# EAGLE board MSP-EXP430F5137RxT_HW-V2_rev-b (EAGLE 5.08)
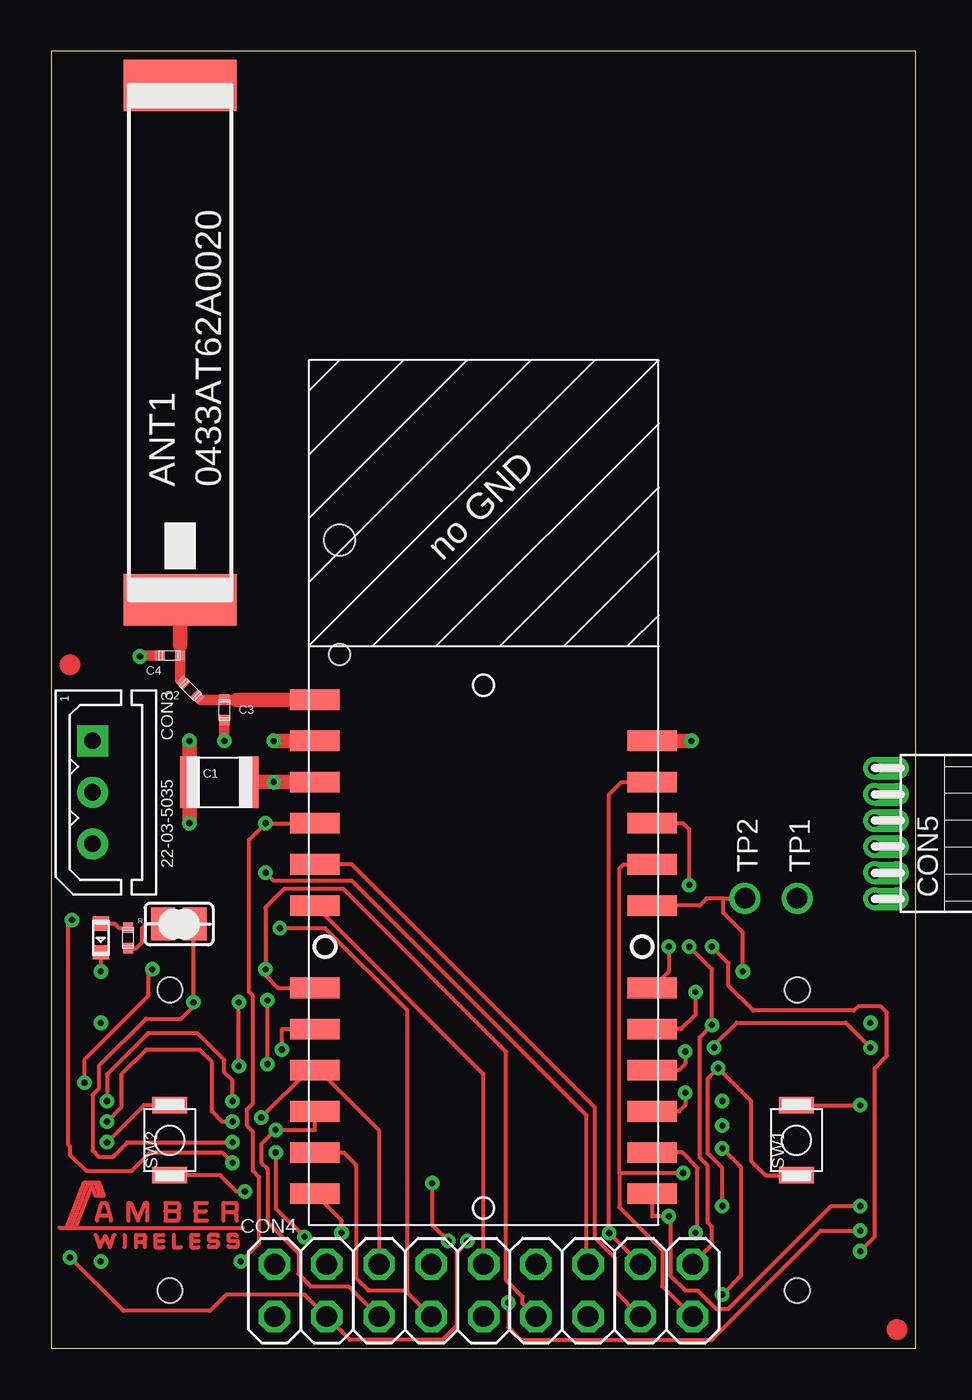
[diagram p0: board, top side]
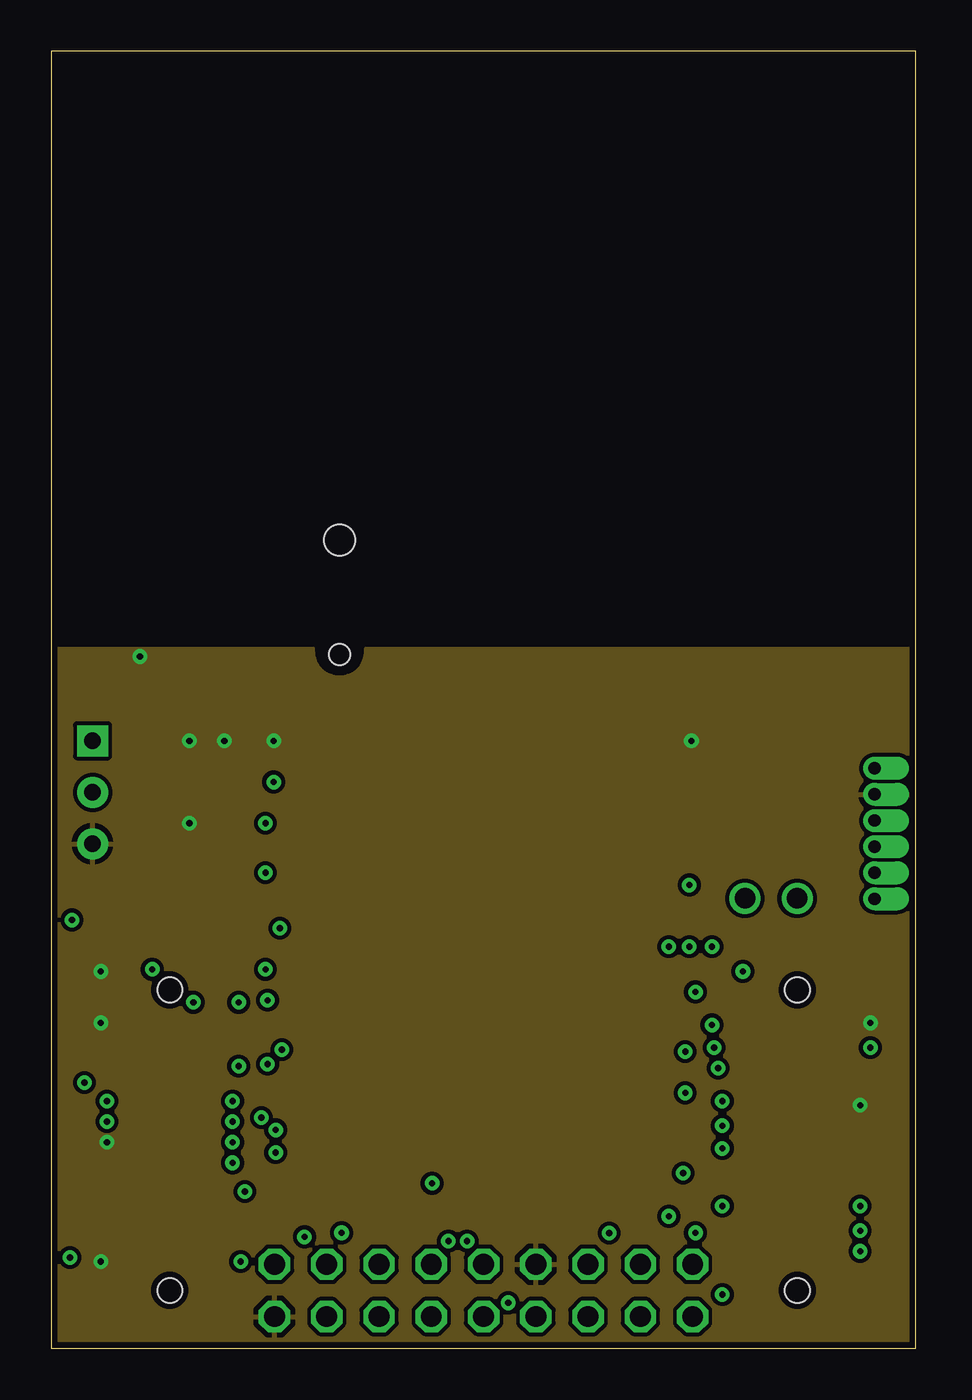
[diagram p1: board, inner layer Route2]
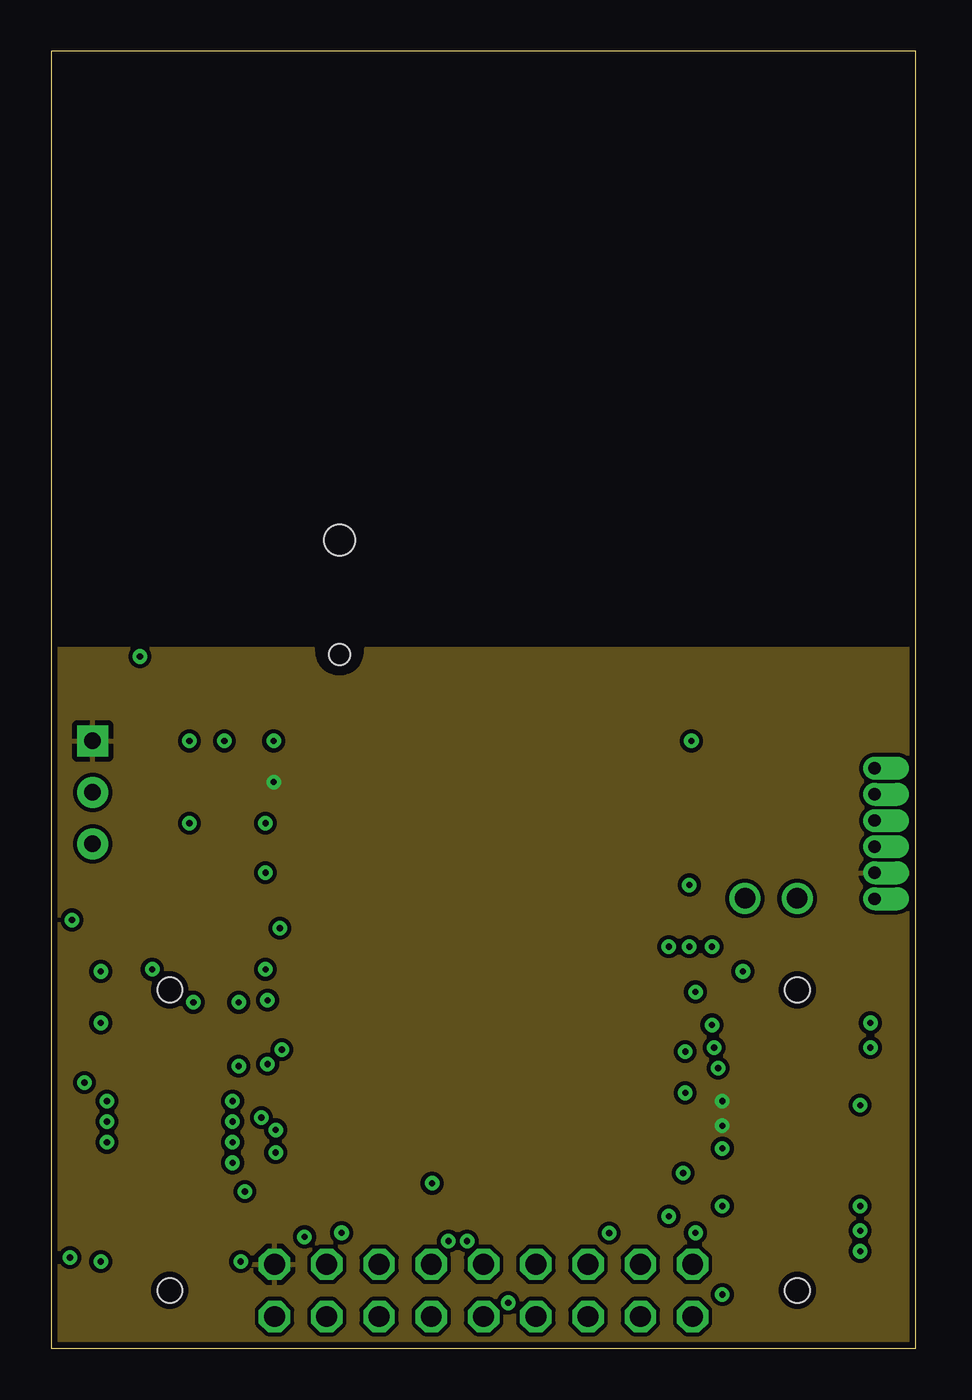
[diagram p2: board, inner layer Route3]
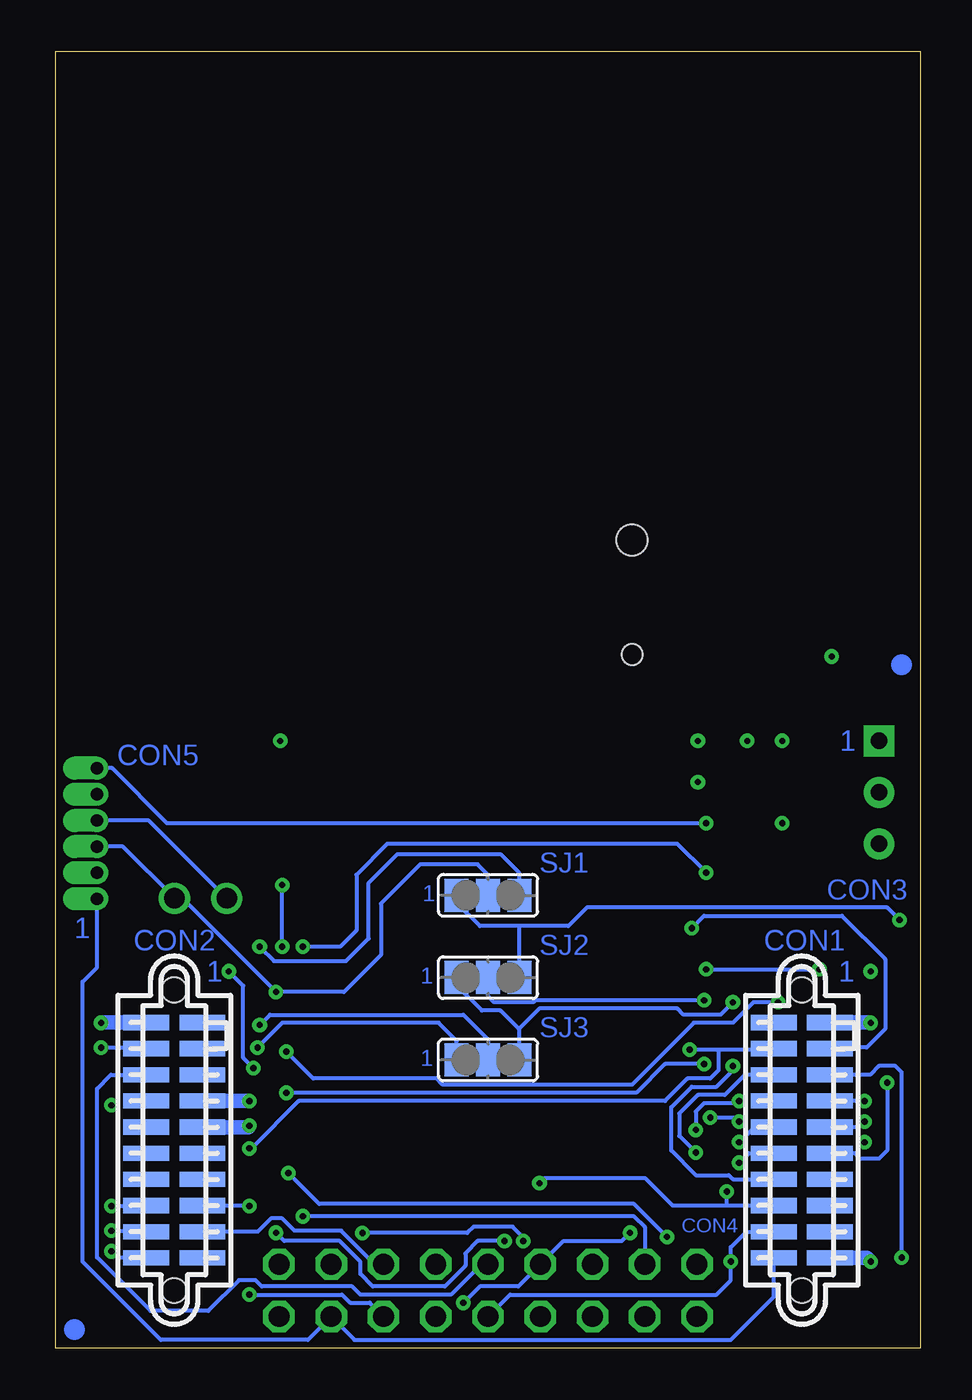
[diagram p3: board, bottom side, seen from below]

Size 42 x 63 mm. Coordinates in mm from the lower left corner, seen from the top.
Outline: 0,0 42,0 42,63 0,63 0,0
Copper layers (1+2*3+16): Top 0.035mm / dielectric 0.35mm / Route2 0.035mm / dielectric 0.76mm / Route3 0.035mm / dielectric 0.35mm / Bottom 0.035mm
Design rules "default *": minimum track width 0.2mm, minimum drill 0.3mm, track to track 0.2mm, track to pad 0.2mm, pad to pad 0.2mm, via to via 0.2mm, smd to smd 0.2mm, copper to edge 0.3mm, drill to drill 8mil, minimum pad ring 10mil, minimum via ring 8mil, stop-mask expansion 4mil, vias tented up to drill 0.3mm, thermal gap 10mil
Holes 1.5 mm at 14,39.25

## Footprints (pad centres in the part's own frame; a part is rotated, then mirrored left to right if it is on the bottom)
0433AT62A0020 = smd 2.5 x 5.5: 1 -12.5,0; 2 12.5,0
C1210 = smd 0.9 x 2.5: 1 -1.45,0; 2 1.45,0
C0402 = smd 0.5 x 0.5: P$1 -0.5,0; P$2 0.5,0
10X2_SAMTEC_F = smd 0.737 x 2.223: 1 -5.715,1.365; 2 -5.715,-1.365; 3 -4.445,1.365; 4 -4.445,-1.365; 5 -3.175,1.365; 6 -3.175,-1.365; 7 -1.905,1.365; 8 -1.905,-1.365; 9 -0.635,1.365; 10 -0.635,-1.365; 11 0.635,1.365; 12 0.635,-1.365; 13 1.905,1.365; 14 1.905,-1.365; 15 3.175,1.365; 16 3.175,-1.365; 17 4.445,1.365; 18 4.445,-1.365; 19 5.715,1.365; 20 5.715,-1.365 | hole 1.194: 7.302,0; -7.302,0
22-03-5035 = drill 0.8 pad 1.5 square: 1 -2.5,0 | drill 0.8 pad 1.5 round: 2 0,0; 3 2.5,0
2X09 = drill 1.016 octagon: 1 -10.16,-1.27; 2 -10.16,1.27; 3 -7.62,-1.27; 4 -7.62,1.27; 5 -5.08,-1.27; 6 -5.08,1.27; 7 -2.54,-1.27; 8 -2.54,1.27; 9 0,-1.27; 10 0,1.27; 11 2.54,-1.27; 12 2.54,1.27; 13 5.08,-1.27; 14 5.08,1.27; 15 7.62,-1.27; 16 7.62,1.27; 17 10.16,-1.27; 18 10.16,1.27
1X06 = drill 0.6 pad 1.016 offset: 1 -3.175,0; 2 -1.905,0; 3 -0.635,0; 4 0.635,0; 5 1.905,0; 6 3.175,0
0603 = smd 0.7 x 0.8: A -0.7,0; K 0.7,0
AMB8520 = smd 2.4 x 1: 1 -8.2,4.5; 2 -8.2,2.5; 3 -8.2,0.5; 4 -8.2,-1.5; 5 -8.2,-3.5; 6 -8.2,-5.5; 7 -8.2,-9.5; 8 -8.2,-11.5; 9 -8.2,-13.5; 10 -8.2,-15.5; 11 -8.2,-17.5; 12 -8.2,-19.5; 13 8.2,-19.5; 14 8.2,-17.5; 15 8.2,-15.5; 16 8.2,-13.5; 17 8.2,-11.5; 18 8.2,-9.5; 19 8.2,-5.5; 20 8.2,-3.5; 21 8.2,-1.5; 22 8.2,0.5; 23 8.2,2.5 | hole 1: -7,6.7
R0402 = smd 0.5 x 0.5: P$1 -0.5,0; P$2 0.5,0
SJ_2 = smd 1.168 x 1.6: 1 -1.524,0; 2 0,0; 3 1.524,0
SJ = smd 1.168 x 1.6: 1 -0.762,0; 2 0.762,0
B3U-1000P = smd 0.8 x 1.7: 1 -1.7,0; 2 1.7,0
D1.0MM = drill 1 round: P$1 0,0

## Placement (x,y rotation side)
ANT1  0433AT62A0020  [0433AT62A0020]  6.25,48.85 90 top
C1  100uF  [C1210]  8.16,27.5 0 top
C2  n.m.  [C0402]  6.75,31.99 135 top
C3  n.m.  [C0402]  8.4,31 270 top
C4  n.m.  [C0402]  5.76,33.65 0 top
CON1  10X2_SAMTEC_F  [10X2_SAMTEC_F]  5.75,10.1 270 bottom
CON2  10X2_SAMTEC_F  [10X2_SAMTEC_F]  36.25,10.1 270 bottom
CON3  22-03-5035  [22-03-5035]  2,27 270 top
CON4  PINHD-2X9  [2X09]  21,2.8 0 top
CON5  1X06_F  [1X06]  40,25 90 top
LED1  APT1608SRCPRV(red)  [0603]  2.4,19.92 270 top
M1  FIDUCIAL_MARK  [FIDUCIAL]  41.1,0.9 0 top
M2  FIDUCIAL_MARK  [FIDUCIAL]  41.1,0.9 0 bottom
M3  FIDUCIAL_MARK  [FIDUCIAL]  0.9,33.2 0 top
M4  FIDUCIAL_MARK  [FIDUCIAL]  0.9,33.2 0 bottom
MODUL1  AMB8520  [AMB8520]  21,27 0 top
R1  470R  [R0402]  3.73,19.92 270 top
SJ1  default 1-2  [SJ_2]  21,22 0 bottom
SJ2  default 1-2  [SJ_2]  21,18 0 bottom
SJ3  default 1-2  [SJ_2]  21,14 0 bottom
SJ4  [SJ]  6.2,20.6 180 top
SW1  B3U-1000P  [B3U-1000P]  36.2,10.1 90 top
SW2  B3U-1000P  [B3U-1000P]  5.75,10.1 90 top
TP1  TP_THD1.0MM  [D1.0MM]  36.24,21.85 0 top
TP2  TP_THD1.0MM  [D1.0MM]  33.7,21.85 0 top
U$1  [CE_LOGO_6MM]  38.92,28.73 90 top
U$3  [3MM_LOGO_NEW_0.2MM]  0.3,4.8 0 top

## Library data of the parts
ANT1 = HF-Bauteile
C1-C4 R1 = rcl-amber
CON1 CON2 = AMBZxxx-EV
CON3 = con-molex
CON4 = pinhead
CON5 = pinhead_1.27mm
LED1 = optic
M1-M4 = fiducial
MODUL1 U$1 U$3 = amber
SJ1-SJ4 = jumper
SW1 SW2 = switch-omron
TP1 TP2 = testpad

## Nets
!RST: CON2.15 CON5.4 MODUL1.19 SW1.1 TP2.P$1
ANT: C2.P$1 C3.P$1 MODUL1.1
GND: C1.1 C3.P$2 C4.P$1 CON1.1 CON1.19 CON2.2 CON3.3 CON4.1 CON4.12 CON5.5 LED1.K MODUL1.2 MODUL1.23 SW1.2 SW2.2
N$1: LED1.A R1.P$1
N$2: R1.P$2 SJ4.2
N$26: ANT1.1 C2.P$2 C4.P$2
P1.0: CON1.10 MODUL1.16 SJ4.1
P1.1: MODUL1.15 SJ2.2
P1.1_DEFAULT: CON1.14 SJ2.1 SJ3.3
P1.5_RXD: CON1.20 CON4.15 CON5.1 MODUL1.5
P1.6_TXD: CON1.18 CON4.9 CON5.6 MODUL1.4
P1.7: CON1.16 CON4.16 MODUL1.22 SW2.1
P2.0: CON1.5 CON4.3 MODUL1.14
P2.1: CON2.16 CON4.4 MODUL1.13
P2.2: CON1.7 CON4.5 MODUL1.10
P2.3: CON1.9 CON4.6 MODUL1.9
P2.4: CON1.3 CON4.7 MODUL1.11
P2.5: CON2.18 CON4.8 MODUL1.12
P3.0: CON1.6 CON4.17 MODUL1.20
P3.1: CON4.18 MODUL1.21 SJ3.2
P3.1_DEFAULT: CON2.4 SJ3.1
PJ.0: CON2.6 CON4.10 MODUL1.6
PJ.1: CON1.11 CON4.11 MODUL1.7
PJ.2: CON1.4 CON4.13 MODUL1.8
PJ.3: CON2.17 CON4.14 MODUL1.18
TEST: CON5.3 MODUL1.17 SJ1.2 TP1.P$1
TEST_ALTERNATIVE: CON2.20 SJ1.3
TEST_DEFAULT: CON1.12 SJ1.1 SJ2.3
VCC: C1.2 CON2.7 CON2.9 CON3.1 CON4.2 CON5.2 MODUL1.3

## Tracks (layer width: path | path; a pad name or v marks a point on that pad's centre or on a via)
!RST  (via drill 0.3)
  Top 0.2: v32.6,6.9 32.6,8.75 31.9,9.45 31.9,13.1 v32.4,13.6 34,12 34,9.1 34.7,8.4 SW1.1 | 32.65,21.85 TP2.P$1 | v33.6,18.3 33.6,20.2 32.65,21.15 32.65,21.85 | MODUL1.19 31.5,21.5 31.85,21.85 32.65,21.85
  Bottom 0.2: v32.4,13.6 32.9,14.1 32.9,17.6 v33.6,18.3 | v32.6,6.9 34.86,6.9 CON2.15 | CON5.4 37.48,25.64 TP2.P$1
ANT
  Top 0.5: C2.P$1 7.24,31.5 C3.P$1 9,31.5
  Top 0.7: 9,31.5 MODUL1.1
GND  (via drill 0.3)
  Top 0.2: LED1.K v2.4,18.3 | SW1.2 v39.3,11.8 | SW2.2 4.5,11.8 v2.7,10
  Top 0.5: v8.4,29.5 C3.P$2 | C4.P$1 4.35,33.65 arc90 v4.3,33.6
  Top 0.7: v10.8,29.5 MODUL1.2 | v6.7,29.5 6.71,29.49 C1.1 6.71,25.51 v6.7,25.5 | MODUL1.23 v31.1,29.5
  Bottom 0.7: CON1.1 2.41,15.81 v2.4,15.8 | CON2.2 39.78,15.81 v39.8,15.8 | CON1.19 2.59,4.38 v2.4,4.2
  pour Route2: 15.3,34 42,34 42,0 0,0 0,34 12.7,34 12.7,33.87 arc90 13.97,32.6 14.03,32.6 arc90 15.3,33.87
N$1
  Top 0.2: R1.P$1 3.28,20.42 3.08,20.62 LED1.A
N$2
  Top 0.2: R1.P$2 4.12,19.42 4.4,19.7 4.4,20.4 4.6,20.6 SJ4.2
N$26
  Top 0.5: C2.P$2 6.26,32.48 C4.P$2 6.26,34.16 | ANT1.1
  Top 0.7: ANT1.1 | 6.26,34.16 ANT1.1
P1.0  (via drill 0.3)
  Top 0.2: 6.9,20.6 SJ4.1 6.9,20.54 v6.9,16.8 6.9,16.6 6.3,16 4.6,16 2.3,13.7 2.3,12.6 2,12.3 2,9.6 2.3,9.3 3,9.3 3.7,10 v8.8,10 | MODUL1.16 30.5,13.5 30.8,13.8 v30.8,14.4
  Bottom 0.2: v30.8,14.4 29.5,13.1 23.5,13.1 23.2,12.8 14,12.8 11,15.8 9.1,15.8 8.1,16.8 v6.9,16.8 | v8.8,10 8.06,10.73 CON1.10
P1.1  (via drill 0.3)
  Top 0.2: v10.5,13.8 v10.5,16.9 | MODUL1.15 30.5,11.5 30.8,11.8 v30.8,12.4
  Bottom 0.2: v10.5,13.8 12.4,13.8 13.8,12.4 v30.8,12.4 | SJ2.2 21,17.1 20.7,16.8 18.8,16.8 18.7,16.9 v10.5,16.9
P1.1_DEFAULT  (via drill 0.3)
  Top 0.2: v9.1,13.7 v9.1,16.8
  Bottom 0.2: SJ3.3 19.5,14 19.5,15.5 | SJ2.1 22.5,18 22.5,17.6 21.3,16.4 20.4,16.4 19.5,15.5 | v9.1,13.7 9.1,13.5 9.9,12.7 11.1,12.7 12.1,11.7 12.1,9.6 10.9,8.4 9.3,8.4 9.1,8.2 CON1.14 7.12,8.21 CON1.14 | v9.1,16.8 9.7,16.2 11.5,16.2 11.8,16.5 18.5,16.5 19.5,15.5
P1.5_RXD
  Top 0.2: MODUL1.5 14.6,23.5 26.4,11.7 26.4,5.36 27.4,4.36 27.4,2.75 CON4.15
  Bottom 0.2: CON1.20 7.12,2.48 9.2,0.4 27.49,0.4 CON4.15 29.75,0.4 36.9,0.4 40.7,4.2 40.7,17.8 40,18.5 CON5.1
P1.6_TXD  (via drill 0.3)
  Top 0.2: v9.2,4.2 10.1,5.1 10.1,8.3 9.8,8.6 9.8,10.5 9.5,10.8 9.5,11.6 9.8,11.9 9.8,17.1 9.6,17.3 9.6,24.7 v10.4,25.5 MODUL1.4
  Bottom 0.2: CON4.9 19.93,2.6 9.9,2.6 9.2,3.3 v9.2,4.2 9.2,4.9 8.45,5.66 CON1.18 | v10.4,25.5 36.6,25.5 39.27,28.18 CON5.6
P1.7  (via drill 0.3)
  Top 0.2: MODUL1.22 27.7,27.5 27.1,26.9 v27.1,5.59 CON4.16 | v18.5,8.01 18.5,5.99 v19.29,5.2 | SW2.1 8.2,8.4 9,7.6 v9.4,7.6
  Bottom 0.2: v27.1,5.59 22.01,5.59 21.7,5.9 19.8,5.9 19.29,5.39 v19.29,5.2 | 9.4,6.92 12.04,6.92 13.35,8.24 18.27,8.24 v18.5,8.01 | 9.4,6.92 CON1.16 | 9.4,6.92 v9.4,7.6
P2.0  (via drill 0.3)
  Top 0.2: MODUL1.14 30.65,9.5 31.4,8.75 31.4,5.75 31.3,5.65 v31.3,5.6 | v0.9,4.4 3.5,1.8 7.7,1.8 8.5,2.6 12.31,2.6 CON4.3 14.51,0.4 19,0.4 19.7,1.1 19.7,4.64 20.2,5.14 v20.2,5.2
  Bottom 0.2: v31.3,5.6 30.9,5.2 28.21,5.2 27.2,4.19 27.2,3.6 26.6,3 23.1,3 22.1,4 22.1,4.6 21.5,5.2 v20.2,5.2 | CON1.5 2.43,13.28 2,13.7 1.2,13.7 0.9,13.4 v0.9,4.4
P2.1  (via drill 0.3)
  Top 0.2: v39.3,6.9 37.9,6.9 32.9,1.9 32.3,1.9 31.4,2.8 30.8,2.8 30.09,3.51 30.09,6.25 30,6.34 v30,6.4 29.2,6.4 MODUL1.13
  Bottom 0.2: CON4.4 13.38,5.88 13.9,6.4 v30,6.4 | v39.3,6.9 37.64,6.9 CON2.16
P2.2  (via drill 0.3)
  Top 0.2: v8.8,12 8.8,13 8.4,13.4 8.4,14 7.1,15.3 4.7,15.3 2.7,13.3 v2.7,12 | MODUL1.10 12.8,10.6 v10.9,10.6 10.2,9.9 10.2,9 10.5,8.7 10.5,6.1 12,4.6 12,3.6 12.6,3 14.45,3 CON4.5
  Bottom 0.2: v8.8,12 8.9,11.9 10.5,11.9 10.9,11.5 v10.9,10.6 | v2.7,12 v2.7,12.01 CON1.7
P2.3  (via drill 0.3)
  Top 0.2: v8.8,11 8.3,11 7.8,11.5 7.8,13.9 7.2,14.5 4.6,14.5 3.4,13.3 3.4,11.7 v2.7,11 | v10.2,11.2 12.5,13.5 MODUL1.9 13,13.5 15.92,10.58 CON4.6
  Bottom 0.2: v8.8,11 9,11.2 v10.2,11.2 | v2.7,11 2.96,10.73 CON1.9
P2.4  (via drill 0.3)
  Top 0.2: v11.1,20.4 13.3,20.4 17.3,16.4 17.3,2.8 | 17.3,2.8 15.4,2.8 14.8,3.4 14.8,8.9 14.2,9.5 MODUL1.11 | CON4.7 17.3,2.69 17.3,2.8
  Bottom 0.2: v11.1,20.4 10.5,21 3.8,21 1.7,18.9 1.7,15.5 2.6,14.6 4.33,14.6 CON1.3
P2.5  (via drill 0.3)
  Top 0.2: v39.3,5.7 37.4,5.7 32.1,0.4 22.8,0.4 22.2,1 v22.2,2.2 | MODUL1.12 14.1,6.2 v14.1,5.6
  Bottom 0.2: v22.2,2.2 21.4,3 19.53,3 CON4.8 17.33,5.2 14.5,5.2 v14.1,5.6 | v39.3,5.7 37.66,5.7 CON2.18
P3.0  (via drill 0.3)
  Top 0.2: MODUL1.20 27.8,23.5 27.6,23.3 27.6,8.5 | CON4.17 29.69,3 29.69,4.75 27.9,6.54 27.9,6.55 27.6,6.85 27.6,8.5 | v10.9,9.5 10.9,6.8 v12.3,5.4 | v30.7,8.5 27.6,8.5
  Bottom 0.2: CON1.6 8.53,13.28 9.5,12.3 10.8,12.3 11.7,11.4 11.7,10.3 v10.9,9.5 | v12.3,5.4 13.9,7 29.2,7 v30.7,8.5
P3.1  (via drill 0.3)
  Top 0.2: MODUL1.21 30.7,25.5 31,25.2 v31,22.5 | v31,19.5 32.1,18.4 v32.1,15.7 31.5,15.1 31.5,9.25 31.9,8.85 31.9,6.1 32.1,5.9 32.1,5.01 CON4.18
  Bottom 0.2: v32.1,15.7 31.6,16.2 22.2,16.2 21,15 SJ3.2 | v31,19.5 v31,22.5
P3.1_DEFAULT  (via drill 0.3)
  Top 0.2: v32.2,14.6 32.2,14.7 33.3,15.8 38.6,15.8 v39.8,14.6
  Bottom 0.2: SJ3.1 22.52,14.92 23.4,15.8 31,15.8 v32.2,14.6 | v39.8,14.6 37.67,14.6 CON2.4
PJ.0
  Top 0.2: MODUL1.6 21,13.3 CON4.10
  Bottom 0.2: CON4.10 21,4 21.4,4 22.8,2.6 27.2,2.6 27.6,3 32,3 32.3,3.3 33.1,3.3 34.6,1.8 37.4,1.8 40,4.4 40,12.6 39.33,13.28 CON2.6
PJ.1  (via drill 0.3)
  Top 0.2: v1.6,12.9 1.6,14 4.7,17.1 4.7,18.2 v4.9,18.4 | CON4.11 22.9,2.17 22.9,2.5 22.1,3.3 22.1,14.4 14.2,22.3 11.3,22.3 10.4,21.4 v10.4,18.4 10.4,18.1 11,17.5 MODUL1.7
  Bottom 0.2: v10.4,18.4 v4.9,18.4 | CON1.11 3.16,9.46 2.9,9.2 2,9.2 1.6,9.6 v1.6,12.9
PJ.2  (via drill 0.3)
  Top 0.2: v32.6,9.7 33.5,8.8 33.5,3.5 v32.6,2.6 | v11.2,14.5 11.2,15.5 MODUL1.8
  Bottom 0.2: 9.8,14.5 v11.2,14.5 | v32.6,2.6 28.1,2.6 27.7,2.2 26.75,2.2 CON4.13 | v32.6,9.7 32.5,9.7 30.2,12 12.4,12 11.3,13.1 10.2,13.1 9.8,13.5 9.8,14.5 | CON1.4 7.16,14.5 9.8,14.5
PJ.3  (via drill 0.3)
  Top 0.2: MODUL1.18 30,18.3 v30,19.5 | v10.4,23.1 10.8,22.7 14.6,22.7 26,11.3 26,4.15 CON4.14
  Bottom 0.2: v30,19.5 28.2,19.5 27.4,20.3 27.4,23 25.9,24.5 11.8,24.5 v10.4,23.1 | 34.84,5.7 CON2.17 32.2,5.66 31.55,6.3 31,6.3 30.4,5.7 28.14,5.7 26.54,4.1 26.11,4.1 CON4.14
TEST  (via drill 0.3)
  Top 0.2: v31.3,17.3 31.3,16.2 30.6,15.5 MODUL1.17
  Bottom 0.2: SJ1.2 21,23 21.5,23.5 24.3,23.5 26.2,21.6 26.2,19.1 28,17.3 v31.3,17.3 35.85,21.85 TP1.P$1 38.75,24.36 CON5.3
TEST_ALTERNATIVE  (via drill 0.3)
  Top 0.2: v39.3,4.7 40,5.4 40,13.6 40.6,14.2 40.6,16.3 40.3,16.6 39.2,16.6 39,16.4 34.1,16.4 32.9,17.6 32.9,18.7 v32.1,19.5
  Bottom 0.2: v32.1,19.5 31.4,18.8 27.9,18.8 26.8,19.9 26.8,22.6 25.4,24 20.4,24 19.5,23.1 19.5,22 SJ1.3 | CON2.20 38.98,4.38 v39.3,4.7
TEST_DEFAULT  (via drill 0.3)
  Top 0.2: v8.8,9 8.3,9.5 4.8,9.5 3.9,8.6 1.7,8.6 0.9,9.4 0.9,9.8 0.8,9.9 0.8,20.6 v1,20.8
  Bottom 0.2: 19.5,20.5 19.5,18 SJ2.3 | 19.5,20.5 21.4,20.5 22.5,21.6 22.5,22 SJ1.1 | v1,20.8 1.6,21.4 16.2,21.4 17.1,20.5 19.5,20.5 | CON1.12 8.34,9.46 v8.8,9
VCC  (via drill 0.3)
  Top 0.7: C1.2 v10.8,27.5 MODUL1.3
  Bottom 0.7: CON2.7 v32.61,12.01 v32.6,12 | v32.6,10.8 32.66,10.73 CON2.9
  pour Route3: 15.3,34 42,34 42,0 0,0 0,34 12.7,34 12.7,33.87 arc90 13.97,32.6 14.03,32.6 arc90 15.3,33.87

## Text on the board
Bottom: 1 | CON5 | CON3 | SJ1 | 1 | 1 | CON1 | SJ2 | CON2 | 1 | 1 | 1 | SJ3 | 1 | CON4
bStop: 1 | CON5 | CON3 | 1 | CON1 | CON2 | 1 | 1 | CON4
Measures: 42mm | 63mm
tPrint: P1.0 | P1.7 | RESET | 1 | Rev 2.0